# Altium PCB PCB1.PcbDoc
Units mil, origin at the board's own origin, x right, y up, seen from the top; angles counter-clockwise.
Board outline 4000 x 3125 mil, 4 copper layers (Top Layer, GND, POWER, Bottom Layer), stack 30.634 mil thick; 119 components, 91 nets, 399 pads, 77 vias.
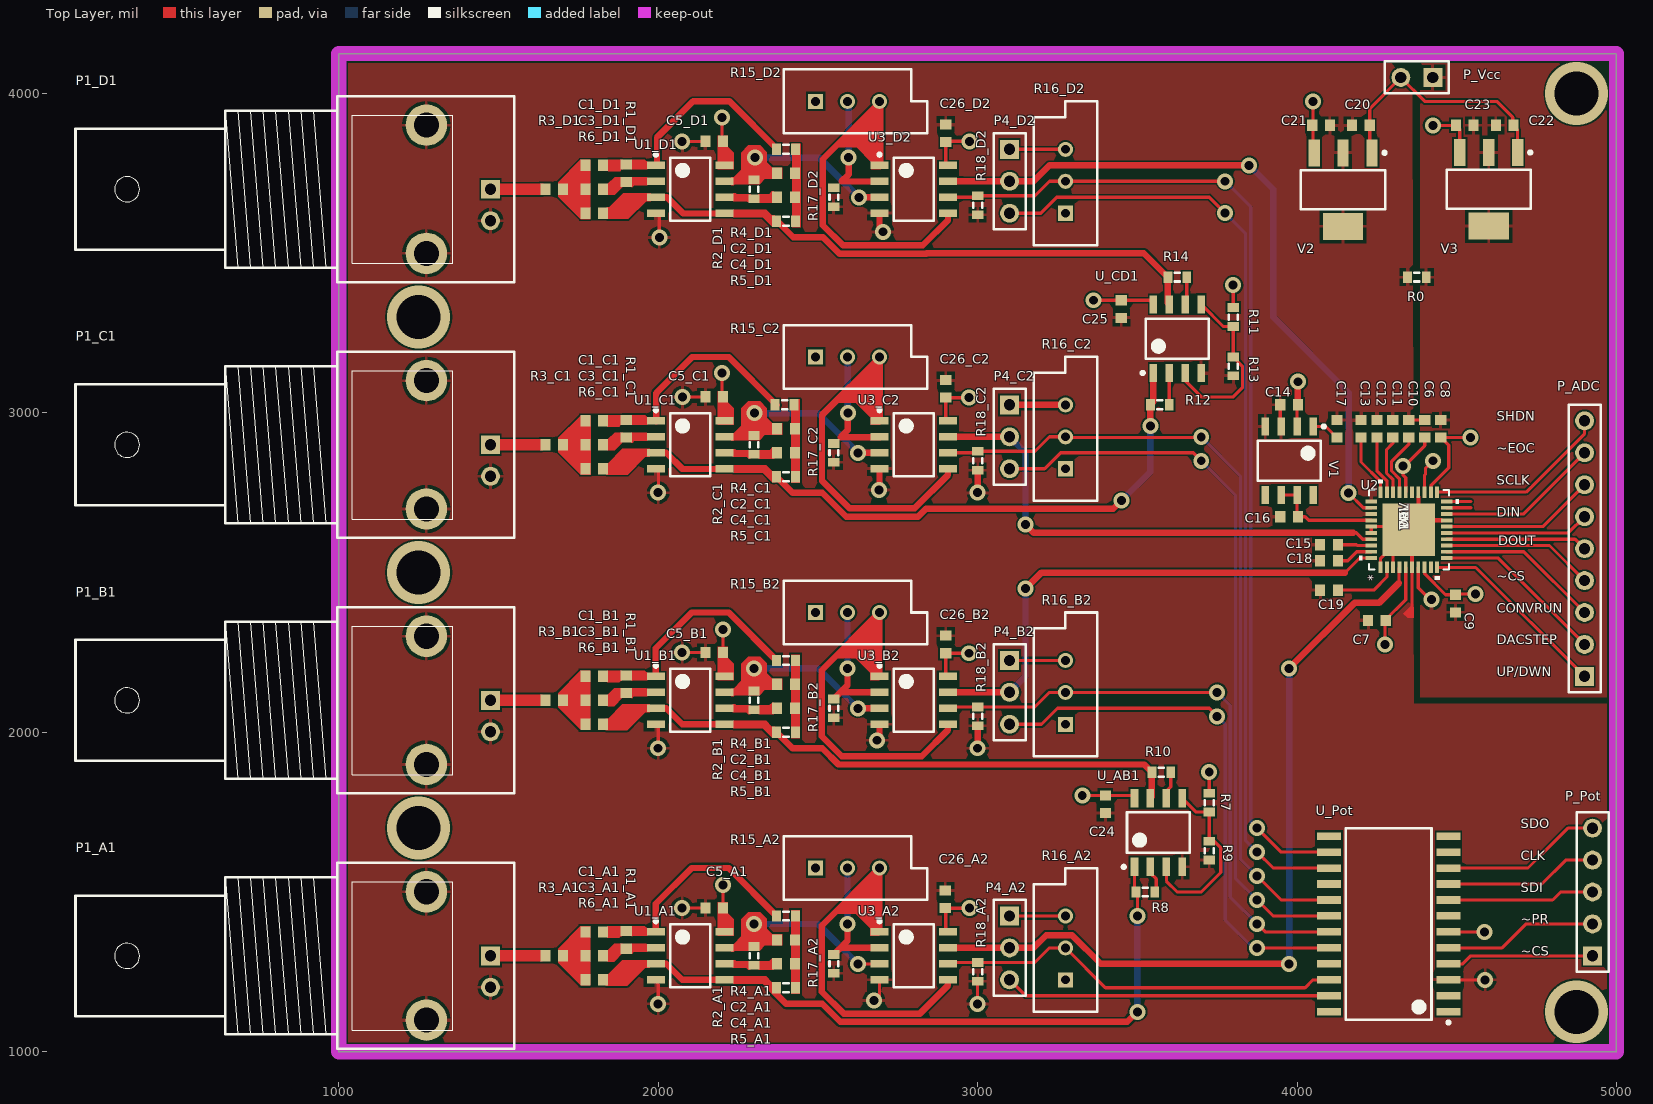
[diagram p0: Top Layer view]
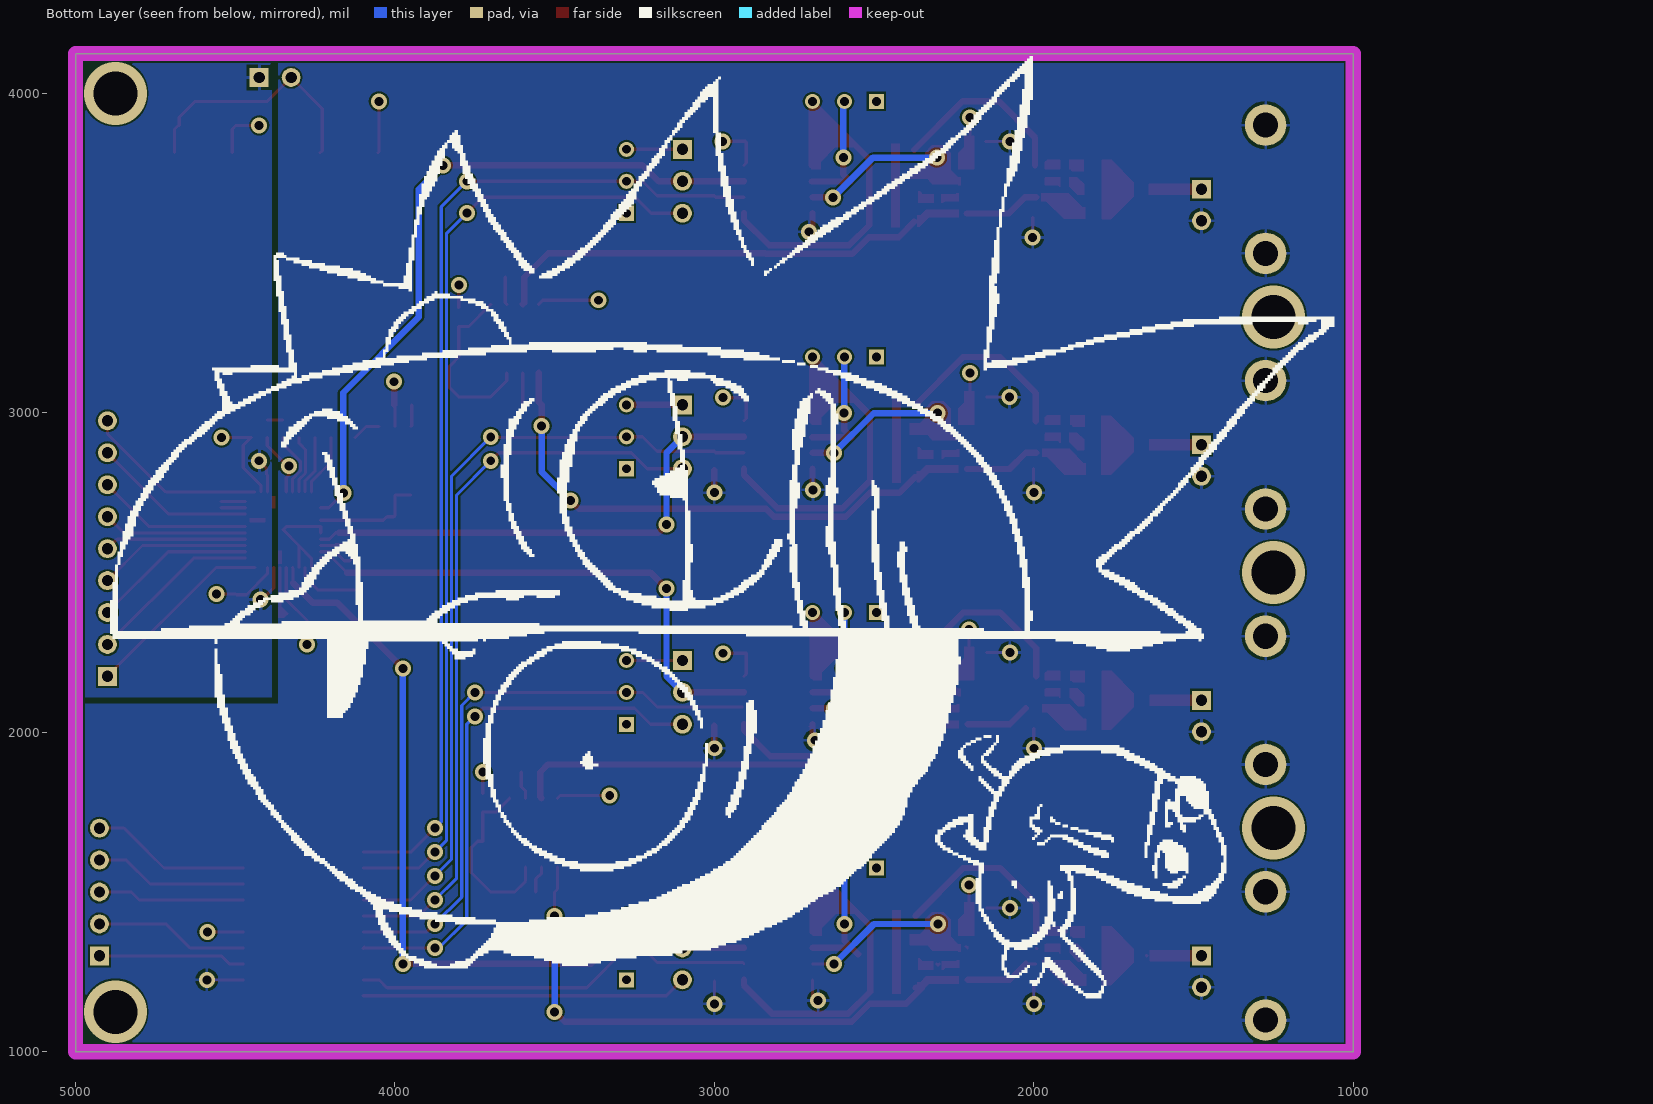
[diagram p1: Bottom Layer view, seen from below]
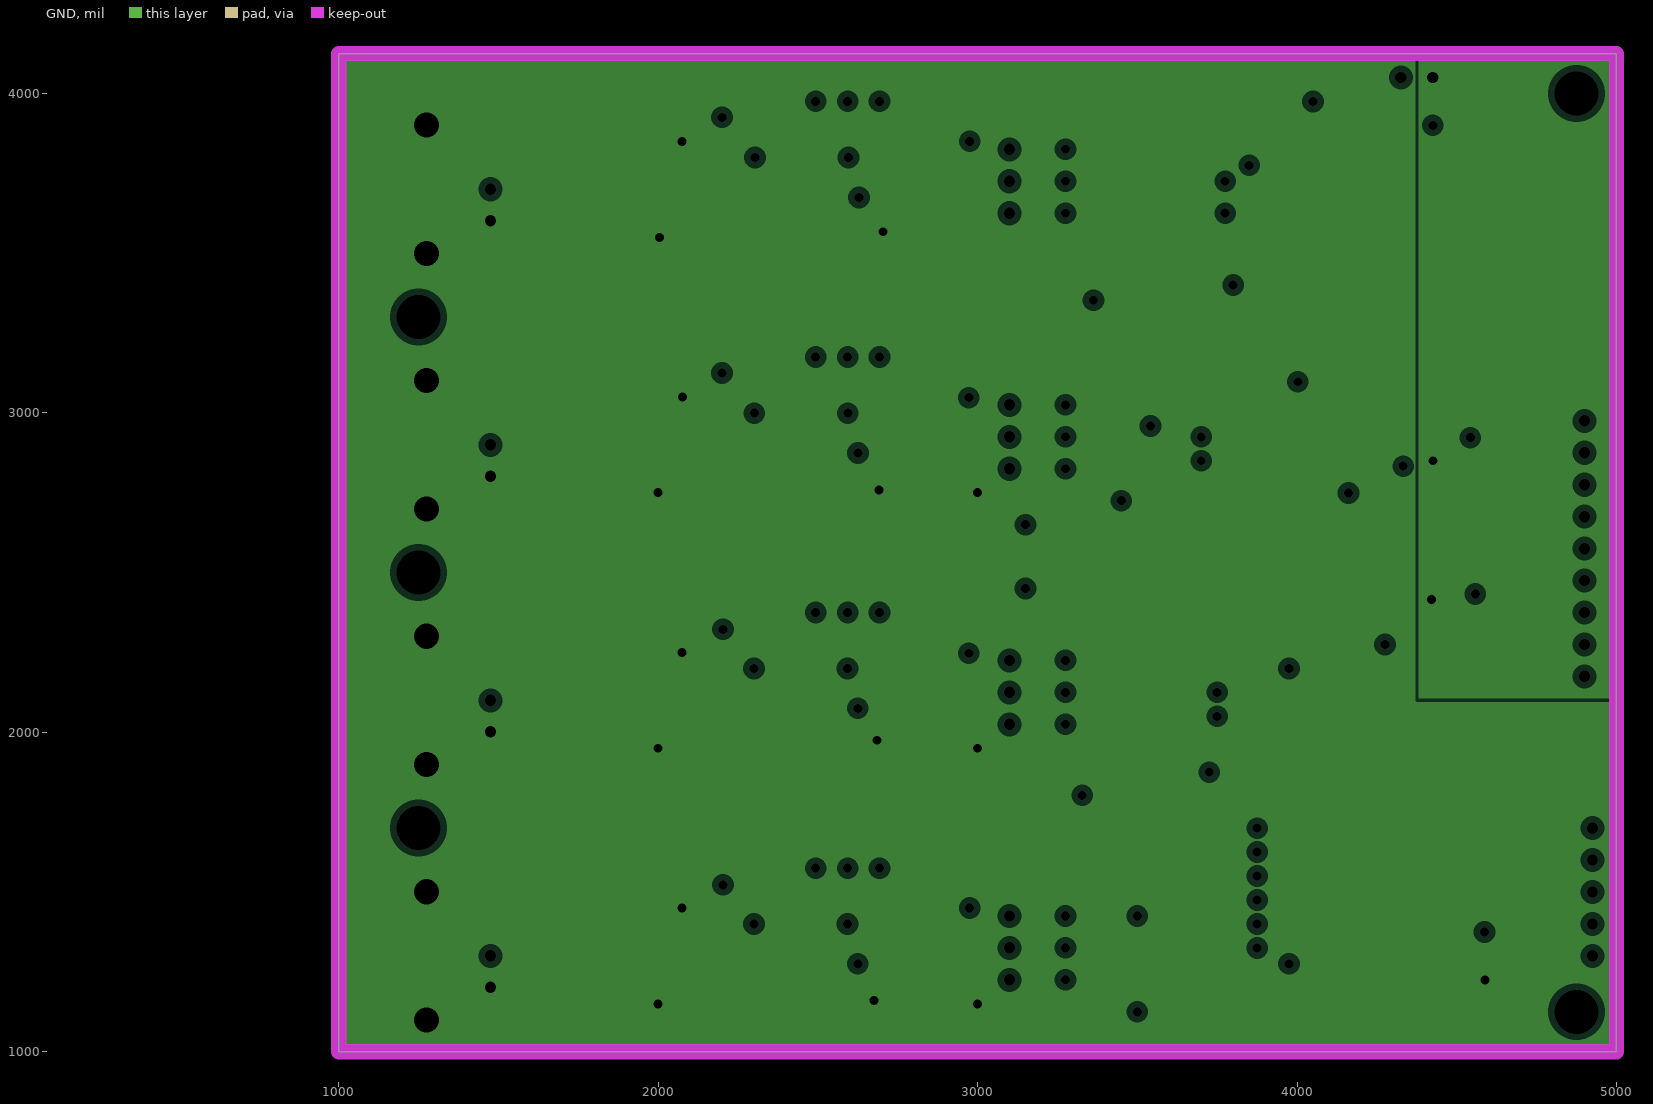
[diagram p2: GND, clearances drawn from the general rule]
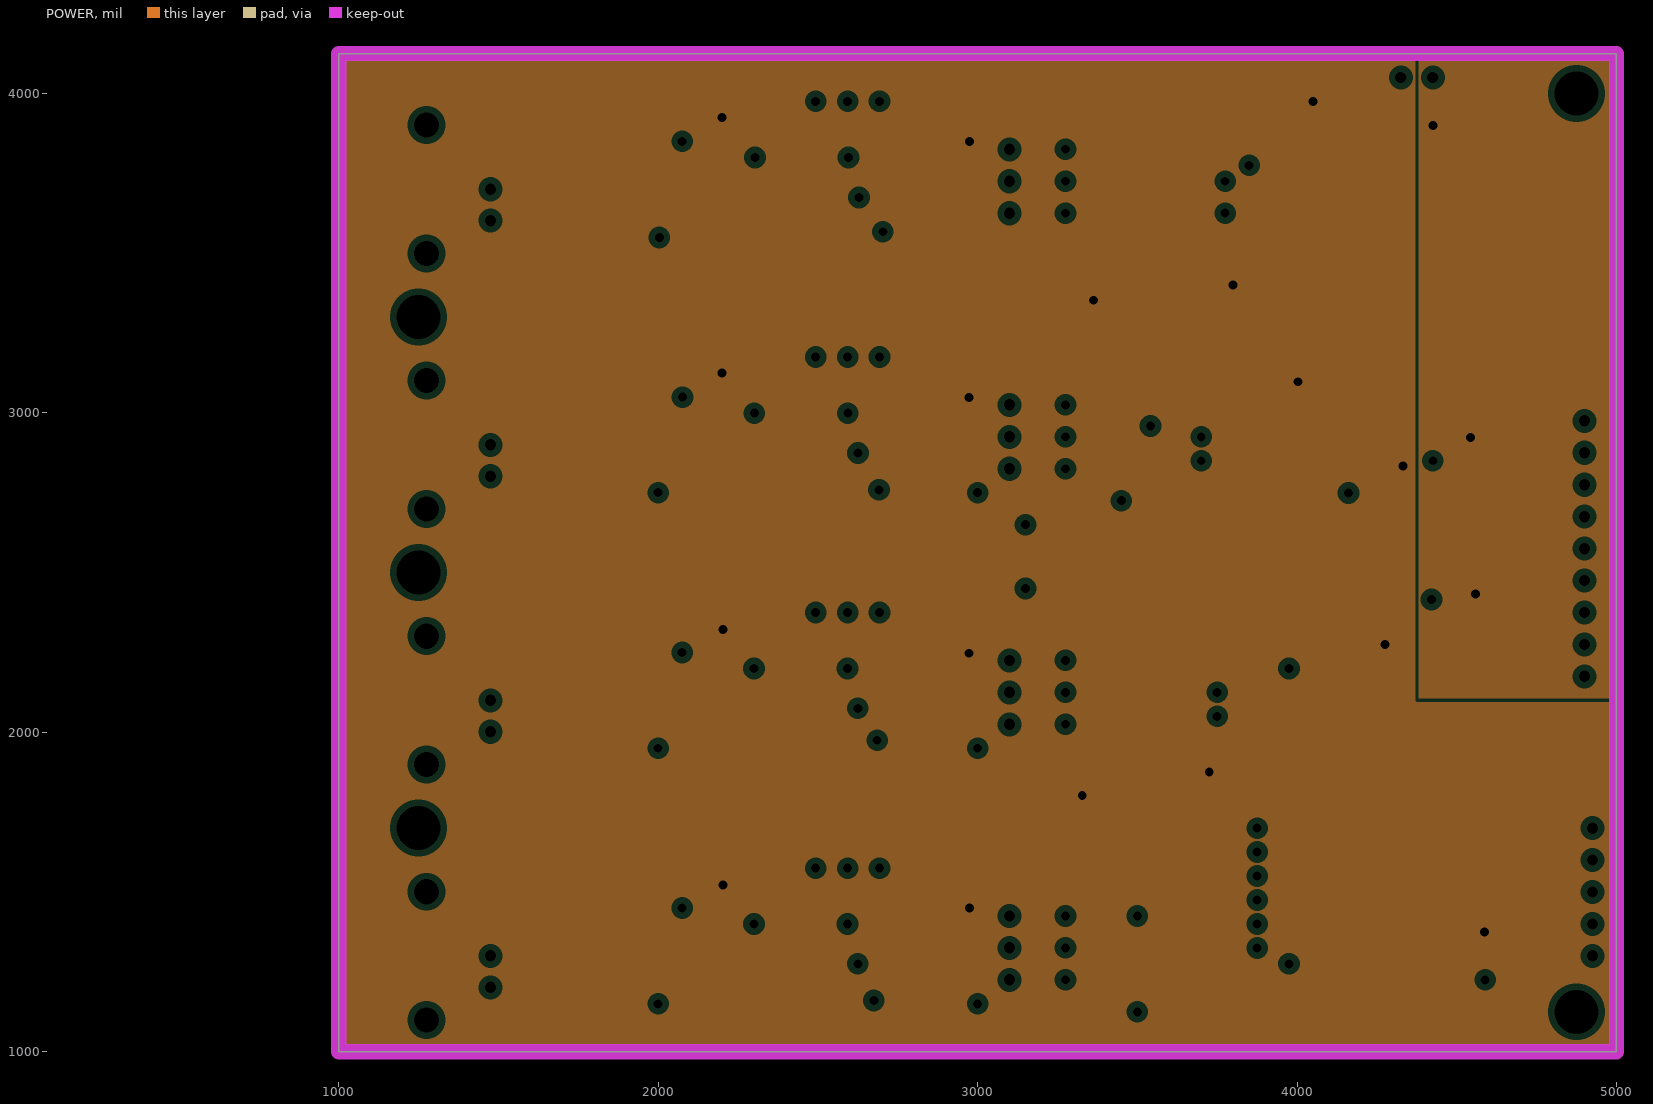
[diagram p3: POWER, clearances drawn from the general rule]

## Layer stack, top to bottom
Top Solder: solder mask 0.4, Solder Resist, Dk 3.5
Top Layer: signal copper 1.4
Dielectric 1: core 10, FR-4, Dk 4.2
GND: plane copper 1.417, net (Multiple Nets)
Dielectric 3: prepreg 5, Dk 4.2
POWER: plane copper 1.417, net (Multiple Nets)
Dielectric 2: core 10, Dk 4.2
Bottom Layer: signal copper 1.4
Bottom Solder: solder mask 0.4, Solder Resist, Dk 3.5

## Board outline
1000,1000 5000,1000 5000,4125 1000,4125

## Design rules (kind name [scope] priority, off if disabled: settings)
Clearance [All] p1: gap=6
PlaneClearance [All] p1: clearance=20
PlaneConnect [All] p1: planeconnectstyle=Relief reliefexpansion=20 reliefentries=4 reliefconductorwidth=10 reliefairgap=10
PolygonConnect [All] p1: connectstyle=Relief reliefconductorwidth=10 reliefentries=4 polygonreliefangle="90 Angle" airgapwidth=10
RoomDefinition D1 [InComponentClass('D1')] p1 off: confinementstyle=ConfineIn formatcopy=TRUE lockcomponents=FALSE outline 0,0 2000,0 2000,1000 0,1000
RoomDefinition C2 [InComponentClass('C2')] p2 off: confinementstyle=ConfineIn formatcopy=TRUE lockcomponents=FALSE outline 0,0 2000,0 2000,1000 0,1000
RoomDefinition C1 [InComponentClass('C1')] p3 off: confinementstyle=ConfineIn formatcopy=TRUE lockcomponents=FALSE outline 0,0 2000,0 2000,1000 0,1000
RoomDefinition B2 [InComponentClass('B2')] p4 off: confinementstyle=ConfineIn formatcopy=TRUE lockcomponents=FALSE outline 0,0 2000,0 2000,1000 0,1000
RoomDefinition B1 [InComponentClass('B1')] p5 off: confinementstyle=ConfineIn formatcopy=TRUE lockcomponents=FALSE outline 0,0 2000,0 2000,1000 0,1000
RoomDefinition A2 [InComponentClass('A2')] p6 off: confinementstyle=ConfineIn formatcopy=TRUE lockcomponents=FALSE outline 0,0 2000,0 2000,1000 0,1000
RoomDefinition A1 [InComponentClass('A1')] p7 off: confinementstyle=ConfineIn formatcopy=TRUE lockcomponents=FALSE outline 0,0 2000,0 2000,1000 0,1000
RoomDefinition U_Power [InComponentClass('U_Power')] p8 off: confinementstyle=ConfineIn formatcopy=TRUE lockcomponents=FALSE outline 0,0 2000,0 2000,1000 0,1000
RoomDefinition U_ADC [InComponentClass('U_ADC')] p9 off: confinementstyle=ConfineIn formatcopy=TRUE lockcomponents=FALSE outline 0,0 2000,0 2000,1000 0,1000
RoomDefinition Top_level [InComponentClass('Top_level')] p10 off: confinementstyle=ConfineIn formatcopy=TRUE lockcomponents=FALSE outline 0,0 2000,0 2000,1000 0,1000
RoomDefinition D2 [InComponentClass('D2')] p11 off: confinementstyle=ConfineIn formatcopy=TRUE lockcomponents=FALSE outline 0,0 2000,0 2000,1000 0,1000
RoutingVias [All] p1: holewidth=28 width=50 viastyle="Through Hole" minholewidth=28 minwidth=50 maxholewidth=28 maxwidth=50
SolderMaskExpansion [All] p1: expansion=4
Width [All] p1: maxlimit=20 minlimit=10 preferedwidth=10
28 further rules are at their usual default settings.

## Classes and differential pairs
channel class Amp_Stage: A2 B2 C2 D2
component class A1: C1_A1 C2_A1 C3_A1 C4_A1 C5_A1 P1_A1 R1_A1 R2_A1 R3_A1 R4_A1 R5_A1 R6_A1 U1_A1
component class B2: C26_B2 P4_B2 R15_B2 R16_B2 R17_B2 R18_B2 U3_B2
component class C2: C26_C2 P4_C2 R15_C2 R16_C2 R17_C2 R18_C2 U3_C2
component class D2: C26_D2 P4_D2 R15_D2 R16_D2 R17_D2 R18_D2 U3_D2
component class A2: C26_A2 P4_A2 R15_A2 R16_A2 R17_A2 R18_A2 U3_A2
component class B1: C1_B1 C2_B1 C3_B1 C4_B1 C5_B1 P1_B1 R1_B1 R2_B1 R3_B1 R4_B1 R5_B1 R6_B1 U1_B1
component class C1: C1_C1 C2_C1 C3_C1 C4_C1 C5_C1 P1_C1 R1_C1 R2_C1 R3_C1 R4_C1 R5_C1 R6_C1 U1_C1
component class D1: C1_D1 C2_D1 C3_D1 C4_D1 C5_D1 P1_D1 R1_D1 R2_D1 R3_D1 R4_D1 R5_D1 R6_D1 U1_D1
component class Top_level: C24 C25 P_ADC P_Pot P_Vcc R0 R7 R8 R9 R10 R11 R12 R13 R14 U_AB1 U_CD1 U_Pot
component class U_ADC: C6 C7 C8 C9 C10 C11 C12 C13 C14 C15 C16 C17 C18 C19 U2 V1
component class U_Power: C20 C21 C22 C23 V2 V3
channel class Active_filter: A2 B2 C2 D2

## Components (designator, comment, footprint, x,y, rotation, side; value= is the part's Value field where it differs from the comment)
C1_A1 "Cap" 1608[0603] 1800,1375 r0 top (schematic designator C1)
C1_B1 "Cap" 1608[0603] 1800,2175 r0 top (schematic designator C1)
C1_C1 "Cap" 1608[0603] 1800,2975 r0 top (schematic designator C1)
C1_D1 "Cap" 1608[0603] 1800,3775 r0 top (schematic designator C1)
C2_A1 "Cap" 1608[0603] 2400,1350 r180 top (schematic designator C2)
C2_B1 "Cap" 1608[0603] 2400,2150 r180 top (schematic designator C2)
C2_C1 "Cap" 1608[0603] 2400,2950 r180 top (schematic designator C2)
C2_D1 "Cap" 1608[0603] 2400,3750 r180 top (schematic designator C2)
C3_A1 "Cap" 1608[0603] 1800,1300 r0 top (schematic designator C3)
C3_B1 "Cap" 1608[0603] 1800,2100 r0 top (schematic designator C3)
C3_C1 "Cap" 1608[0603] 1800,2900 r0 top (schematic designator C3)
C3_D1 "Cap" 1608[0603] 1800,3700 r0 top (schematic designator C3)
C4_A1 "Cap" 1608[0603] 2400,1275 r0 top (schematic designator C4)
C4_B1 "Cap" 1608[0603] 2400,2075 r0 top (schematic designator C4)
C4_C1 "Cap" 1608[0603] 2400,2875 r0 top (schematic designator C4)
C4_D1 "Cap" 1608[0603] 2400,3675 r0 top (schematic designator C4)
C5_A1 "Cap" 1608[0603] 2175,1450 r0 top (schematic designator C5)
C5_B1 "Cap" 1608[0603] 2175,2250 r0 top (schematic designator C5)
C5_C1 "Cap" 1608[0603] 2175,3050 r0 top (schematic designator C5)
C5_D1 "Cap" 1608[0603] 2175,3850 r0 top (schematic designator C5)
C6 "Cap" 1608[0603] 4400,2950 r270 top
C7 "Cap" 1608[0603] 4250,2350 r0 top
C8 "Cap" 1608[0603] 4450,2950 r90 top
C9 "Cap" 1608[0603] 4496,2403 r270 top
C10 "Cap" 1608[0603] 4350,2950 r270 top
C11 "Cap" 1608[0603] 4300,2950 r270 top
C12 "Cap" 1608[0603] 4250,2950 r270 top
C13 "Cap" 1608[0603] 4200,2950 r270 top
C14 "Cap" 1608[0603] 3975,3025 r0 top
C15 "Cap" 1608[0603] 4100,2587 r0 top
C16 "Cap" 1608[0603] 3975,2675 r0 top
C17 "Cap" 1608[0603] 4125,2950 r270 top
C18 "Cap" 1608[0603] 4100,2537 r0 top
C19 "Cap" 1608[0603] 4100,2445 r0 top
C20 "Cap" 1608[0603] 4200,3900 r0 top
C21 "Cap" 1608[0603] 4075,3900 r180 top
C22 "Cap" 1608[0603] 4650,3900 r0 top
C23 "Cap" 1608[0603] 4525,3900 r180 top
C24 "Cap" 1608[0603] 3400,1775 r90 top
C25 "Cap" 1608[0603] 3450,3325 r90 top
C26_A2 "Cap" 1608[0603] 2899,1477 r270 top (schematic designator C26)
C26_B2 "Cap" 1608[0603] 2900,2275 r270 top (schematic designator C26)
C26_C2 "Cap" 1608[0603] 2900,3075 r270 top (schematic designator C26)
C26_D2 "Cap" 1608[0603] 2900,3875 r270 top (schematic designator C26)
P1_A1 "BNC" "BNC_RA CON" 1475,1300 r0 top locked (schematic designator P1)
P1_B1 "BNC" "BNC_RA CON" 1475,2100 r0 top locked (schematic designator P1)
P1_C1 "BNC" "BNC_RA CON" 1475,2900 r0 top locked (schematic designator P1)
P1_D1 "BNC" "BNC_RA CON" 1475,3700 r0 top locked (schematic designator P1)
P4_A2 "Header 3" HDR1X3 3100,1425 r270 top (schematic designator P4)
P4_B2 "Header 3" HDR1X3 3100,2225 r270 top (schematic designator P4)
P4_C2 "Header 3" HDR1X3 3100,3025 r270 top (schematic designator P4)
P4_D2 "Header 3" HDR1X3 3100,3825 r270 top (schematic designator P4)
P_ADC "Header 9" HDR1X9 4900,2175 r90 top
P_Pot "Header 5" HDR1X5 4925,1300 r90 top
P_Vcc "Header 2" HDR1X2 4425,4050 r180 top
R0 "Res3" J1-0603 4375,3425 r0 top
R1_A1 "Res3" 1608[0603] 1900,1350 r90 top (schematic designator R1)
R1_B1 "Res3" 1608[0603] 1900,2150 r90 top (schematic designator R1)
R1_C1 "Res3" 1608[0603] 1900,2950 r90 top (schematic designator R1)
R1_D1 "Res3" 1608[0603] 1900,3750 r90 top (schematic designator R1)
R2_A1 "Res3" J1-0603 2300,1300 r270 top (schematic designator R2)
R2_B1 "Res3" J1-0603 2300,2100 r270 top (schematic designator R2)
R2_C1 "Res3" J1-0603 2300,2900 r270 top (schematic designator R2)
R2_D1 "Res3" J1-0603 2300,3700 r270 top (schematic designator R2)
R3_A1 "Res3" 1608[0603] 1675,1300 r180 top (schematic designator R3)
R3_B1 "Res3" 1608[0603] 1675,2100 r180 top (schematic designator R3)
R3_C1 "Res3" 1608[0603] 1675,2900 r180 top (schematic designator R3)
R3_D1 "Res3" 1608[0603] 1675,3700 r180 top (schematic designator R3)
R4_A1 "Res3" J1-0603 2400,1425 r180 top (schematic designator R4)
R4_B1 "Res3" J1-0603 2400,2225 r180 top (schematic designator R4)
R4_C1 "Res3" J1-0603 2395.47,3025 r180 top (schematic designator R4)
R4_D1 "Res3" J1-0603 2400,3825 r180 top (schematic designator R4)
R5_A1 "Res3" J1-0603 2400,1200 r180 top (schematic designator R5)
R5_B1 "Res3" J1-0603 2400,2000 r180 top (schematic designator R5)
R5_C1 "Res3" J1-0603 2400,2800 r180 top (schematic designator R5)
R5_D1 "Res3" J1-0603 2400,3600 r180 top (schematic designator R5)
R6_A1 "Res3" 1608[0603] 1800,1225 r180 top (schematic designator R6)
R6_B1 "Res3" 1608[0603] 1800,2025 r180 top (schematic designator R6)
R6_C1 "Res3" 1608[0603] 1800,2825 r180 top (schematic designator R6)
R6_D1 "Res3" 1608[0603] 1800,3625 r180 top (schematic designator R6)
R7 "Res3" J1-0603 3725,1779.53 r90 top
R8 "Res3" J1-0603 3525,1500 r180 top
R9 "Res3" J1-0603 3725,1629.53 r90 top
R10 "Res3" J1-0603 3575,1875 r180 top
R11 "Res3" J1-0603 3800,3300 r90 top
R12 "Res3" J1-0603 3570.47,3025 r180 top
R13 "Res3" J1-0603 3800,3145.47 r90 top
R14 "Res3" J1-0603 3625,3425 r180 top
R15_A2 "RPot" VR5 2592.72,1575 r0 top (schematic designator R15)
R15_B2 "RPot" VR5 2592.72,2375 r0 top (schematic designator R15)
R15_C2 "RPot" VR5 2592.72,3175 r0 top (schematic designator R15)
R15_D2 "RPot" VR5 2592.72,3975 r0 top (schematic designator R15)
R16_A2 "RPot" VR5 3275,1325 r90 top (schematic designator R16)
R16_B2 "RPot" VR5 3275,2125 r90 top (schematic designator R16)
R16_C2 "RPot" VR5 3275,2925 r90 top (schematic designator R16)
R16_D2 "RPot" VR5 3275,3725 r90 top (schematic designator R16)
R17_A2 "Res3" J1-0603 2550,1275 r90 top (schematic designator R17)
R17_B2 "Res3" J1-0603 2550,2075 r90 top (schematic designator R17)
R17_C2 "Res3" J1-0603 2550,2875 r90 top (schematic designator R17)
R17_D2 "Res3" J1-0603 2550,3675 r90 top (schematic designator R17)
R18_A2 "Res3" J1-0603 3000,1250 r90 top (schematic designator R18)
R18_B2 "Res3" J1-0603 3000,2050 r90 top (schematic designator R18)
R18_C2 "Res3" J1-0603 3000,2850 r90 top (schematic designator R18)
R18_D2 "Res3" J1-0603 3000,3650 r90 top (schematic designator R18)
U1_A1 "LT6234" SOIC127P600X150-8N(LT6233) 2100,1300 r0 top (schematic designator U1)
U1_B1 "LT6234" SOIC127P600X150-8N(LT6233) 2100,2100 r0 top (schematic designator U1)
U1_C1 "LT6234" SOIC127P600X150-8N(LT6233) 2100,2900 r0 top (schematic designator U1)
U1_D1 "LT6234" SOIC127P600X150-8N(LT6233) 2100,3700 r0 top (schematic designator U1)
U2 "MAXIM11043" 21-0141I_T406600 4350,2634 r90 top
U3_A2 "LM358DR" SOIC127P600X175-8N(lm358) 2800,1300 r0 top (schematic designator U3)
U3_B2 "LM358DR" SOIC127P600X175-8N(lm358) 2800,2100 r0 top (schematic designator U3)
U3_C2 "LM358DR" SOIC127P600X175-8N(lm358) 2800,2900 r0 top (schematic designator U3)
U3_D2 "LM358DR" SOIC127P600X175-8N(lm358) 2800,3700 r0 top (schematic designator U3)
U_AB1 "LM358DR" SOIC127P600X175-8N(lm358) 3566,1686 r90 top
U_CD1 "LM358DR" SOIC127P600X175-8N(lm358) 3625,3232.28 r90 top
U_Pot "AD5204" SOIC127P1030X265-24N(AD5204) 4287.01,1400 r180 top
V1 "MAX6126" SOIC127P600X175-8N(lm358) 3975,2850 r270 top
V2 "LM3940" SOT230P700X170-4N 4144,3699 r270 top
V3 "LM3940" SOT230P700X170-4N 4600,3700 r270 top

## Footprints (in the part's own frame and the unit in brackets; to place one, negate y for a bottom-side part, rotate by r counter-clockwise, add the part's x,y. Pads: shape width x height; smd on the part's side, far side on the other; paste and mask are expansions set on the pad)
21-0141I_T406600 [mil]
  rect 36x12 smd: 1(-118,88.58) 2(-118,68.9) 3(-118,49.21) 4(-118,29.53) 5(-118,9.84) 6(-118,-9.84) 7(-118,-29.53) 8(-118,-49.21) 9(-118,-68.9) 10(-118,-88.58) 21(118,-88.58) 22(118,-68.9) 23(118,-49.21) 24(118,-29.53) 25(118,-9.84) 26(118,9.84) 27(118,29.53) 28(118,49.21) 29(118,68.9) 30(118,88.58)
  rect 12x36 smd: 11(-88.58,-118) 12(-68.9,-118) 13(-49.21,-118) 14(-29.53,-118) 15(-9.84,-118) 16(9.84,-118) 17(29.53,-118) 18(49.21,-118) 19(68.9,-118) 20(88.58,-118) 31(88.58,118) 32(68.9,118) 33(49.21,118) 34(29.53,118) 35(9.84,118) 36(-9.84,118) 37(-29.53,118) 38(-49.21,118) 39(-68.9,118) 40(-88.58,118)
  rect 165x165 smd paste-82: 41(0,0)
  silkscreen extent -156,-156 156,156, body extent 0,0 10,10, height 10
1608[0603] [mm] "Chip Capacitor, Body 1.6x0.8mm, IPC High Density"
  rect 0.8x0.9 smd: 1(-0.7,0) 2(0.7,0)
  body extent -0.87,-0.48 0.87,0.48, height 1.3
"BNC_RA CON" [mm] "Connector; BNC Elbow"
  rect 1.5x1.5 hole 0.9: 1(0,0)
  round 3.3 hole 2: 2(-5.1,-5.1) 2(-5.1,5.1)
  round 1.5 hole 0.9: 2(0,-2.5)
  silkscreen extent -33,-7.4 1.9,7.4
HDR1X2 [mm] "Connector; Header; 2 Position"
  rect 1.5x1.5 hole 0.9: 1(0,0)
  round 1.5 hole 0.9: 2(2.54,0)
  silkscreen extent -1.27,-1.27 3.81,1.27
HDR1X3 [mm] "Connector; Header; 3 Position"
  rect 1.5x1.5 hole 0.9: 1(0,0)
  round 1.5 hole 0.9: 2(2.54,0) 3(5.08,0)
  silkscreen extent -1.27,-1.27 6.35,1.27
HDR1X5 [mm] "Connector; Header; 5 Position"
  rect 1.5x1.5 hole 0.9: 1(0,0)
  round 1.5 hole 0.9: 2(2.54,0) 3(5.08,0) 4(7.62,0) 5(10.16,0)
  silkscreen extent -1.27,-1.27 11.43,1.27
HDR1X9 [mm] "Connector; Header; 9 Position"
  rect 1.5x1.5 hole 0.9: 1(0,0)
  round 1.5 hole 0.9: 2(2.54,0) 3(5.08,0) 4(7.62,0) 5(10.16,0) 6(12.7,0) 7(15.24,0) 8(17.78,0) 9(20.32,0)
  silkscreen extent -1.27,-1.27 21.59,1.27
J1-0603 [mm] "Chip Resistor, Body 1.6x0.8mm, IPC High Density"
  rect 0.7x0.9 smd: 1(-0.75,0) 2(0.75,0)
  silkscreen extent -0.2,-0.35 0.2,0.35, body extent -0.85,-0.48 0.85,0.48, height 0.9
SOIC127P600X150-8N(LT6233) [mm] "SOIC, 8-Leads, Body 4.90x3.90mm, Pitch 1.27mm, IPC Medium Density"
  rect 1.45x0.6 smd: 1(-2.725,1.905) 2(-2.725,0.635) 3(-2.725,-0.635) 4(-2.725,-1.905) 5(2.725,-1.905) 6(2.725,-0.635) 7(2.725,0.635) 8(2.725,1.905)
  silkscreen extent -2.85,-2.5 1.6,2.88, body extent -2,-2.5 2,2.5, height 1.5
SOIC127P600X175-8N(lm358) [mm] "SOIC, 8-Leads, Body 4.90x3.90mm, Pitch 1.27mm, IPC Medium Density"
  rect 1.45x0.6 smd: 1(-2.725,1.905) 2(-2.725,0.635) 3(-2.725,-0.635) 4(-2.725,-1.905) 5(2.725,-1.905) 6(2.725,-0.635) 7(2.725,0.635) 8(2.725,1.905)
  silkscreen extent -2.85,-2.5 1.6,2.88, body extent -2,-2.5 2,2.5, height 1.75
SOIC127P1030X265-24N(AD5204) [mm] "SOIC, 24-Leads, Body 15.40x7.50mm, Pitch 1.27mm, IPC Medium Density"
  rect 1.9x0.6 smd: 1(-4.75,6.985) 2(-4.75,5.715) 3(-4.75,4.445) 4(-4.75,3.175) 5(-4.75,1.905) 6(-4.75,0.635) 7(-4.75,-0.635) 8(-4.75,-1.905) 9(-4.75,-3.175) 10(-4.75,-4.445) 11(-4.75,-5.715) 12(-4.75,-6.985) 13(4.75,-6.985) 14(4.75,-5.715) 15(4.75,-4.445) 16(4.75,-3.175) 17(4.75,-1.905) 18(4.75,-0.635) 19(4.75,0.635) 20(4.75,1.905) 21(4.75,3.175) 22(4.75,4.445) 23(4.75,5.715) 24(4.75,6.985)
  silkscreen extent -4.88,-7.6 3.4,7.96, body extent -3.8,-7.6 3.8,7.6, height 2.65
SOT230P700X170-4N [mm] "SOT223, 4-Leads, Body 6.50x7.00mm (avg), Pitch 2.30mm, IPC Medium Density"
  rect 2.15x0.9 smd: 1(-2.925,2.3) 2(-2.925,0) 3(-2.925,-2.3)
  rect 2.15x3.2 smd: 4(2.925,0)
  silkscreen extent -3.05,-3.35 1.55,3.43, body extent -1.85,-3.35 1.85,3.35, height 1.7
VR5 [mm] "Thru-Hole; 3 Leads"
  rect 1.2x1.2 hole 0.7: 1(-2.54,0)
  round 1.2 hole 0.7: 2(0,0) 3(2.54,0)
  silkscreen extent -5.08,-2.54 6.35,2.54

## Part data
C1_A1 C1_B1 C1_C1 C1_D1 C2_A1 C2_B1 C2_C1 C2_D1 C3_A1 C3_B1 C3_C1 C3_D1 C4_A1 C4_B1 C4_C1 C4_D1 C5_A1 C5_B1 C5_C1 C5_D1 C6 C7 C8 C9 C10 C11 C12 C13 C14 C15 C16 C17 C18 C19 C20 C21 C22 C23 C24 C25 C26_A2 C26_B2 C26_C2 C26_D2: "Capacitor"
P1_A1 P1_B1 P1_C1 P1_D1: "BNC Elbow Connector"
P4_A2 P4_B2 P4_C2 P4_D2: "Header, 3-Pin"
P_ADC: "Header, 9-Pin"
P_Pot: "Header, 5-Pin"
P_Vcc: "Header, 2-Pin"
R0 R1_A1 R1_B1 R1_C1 R1_D1 R2_A1 R2_B1 R2_C1 R2_D1 R3_A1 R3_B1 R3_C1 R3_D1 R4_A1 R4_B1 R4_C1 R4_D1 R5_A1 R5_B1 R5_C1 R5_D1 R6_A1 R6_B1 R6_C1 R6_D1 R7 R8 R9 R10 R11 R12 R13 R14 R17_A2 R17_B2 R17_C2 R17_D2 R18_A2 R18_B2 R18_C2 R18_D2: "Resistor"
R15_A2 R15_B2 R15_C2 R15_D2 R16_A2 R16_B2 R16_C2 R16_D2: "Potentiometer"

## Via types
v1: diameter 50, hole 28, Top Layer to Bottom Layer, 72 vias
v2: diameter 196.85, hole 137.8, Top Layer to Bottom Layer, 5 vias

## Nets (pads, with @x,y where several pads share a name; then routed paths per layer and width w, separated by ;. In a path a pad name is that pad's centre, name@x,y a point inside that pad or via, vN(x,y) a via of type N, cw(c..) or ccw(c..) an arc to the next point about the centre after c; other vN are vias at no path point)
3.3V_A: C5_A1.2 C5_B1.2 C5_C1.2 C5_D1.2 C6.2 C7.2 C14.2 C21.2 C24.2 C25.2 C26_A2.2 C26_B2.2 C26_C2.2 C26_D2.2 R7.2 R11.2 U1_A1.8 U1_B1.8 U1_C1.8 U1_D1.8 U2.5 U2.26 U3_A2.8 U3_B2.8 U3_C2.8 U3_D2.8 U_AB1.8 U_CD1.8 U_Pot.6 V1.2 V2.3 | length 2255.4
  Top Layer w10: v1(2200,3125) 2200,3052.56 C5_C1.2 ; v1(2200,3925) 2200,3852.56 C5_D1.2 ; C5_A1.2 v1(2202.56,1522.44) ; C5_B1.2 v1(2202.56,2322.44) ; C26_A2.2 2949.44,1449.44 ; C26_A2.2@2900,1447.44 2900,1382.28 U3_A2.8 ; U3_B2.8 2900,2182.28 C26_B2.2 v1(2972.44,2247.44) ; U3_C2.8 2900,2982.28 C26_C2.2 v1(2972.44,3047.44) ; U3_D2.8 2900,3782.28 C26_D2.2 2902.56,3850 v1(2975,3850) ; v1(3327.56,1802.56) C24.2 3481.72,1802.56 U_AB1.8 ; v1(3362.44,3352.56) C25.2 3537.01,3352.56 U_CD1.8 ; R7.2 v1(3725,1875) ; R11.2 v1(3800,3400) ; V1.2 4000,3022.44 C14.2 ; v1(4050,3975) 4050,3817.61 V2.3 ; v1(4275,2275) 4275,2350 4340.16,2415.16 U2.5 ; U2.26 4340.16,2796.56 4332,2804.72 v1(4332,2833) 4335.56,2833 4400,2897.44 C6.2 ; U_Pot.6 v1(4587,1375)
  Top Layer w20: C14.2 v1(4002.56,3097.44)
  other v1: 2975,1450
5V: C20.2 C22.2 P_Vcc.2 V2.1 V3.1 | length 796.1
  Top Layer w10: V2.1 4227.56,3821.15 C20.2 4227.56,3952.56 P_Vcc.2 4400,3975 4625,3975 4675,3925 C22.2@4675,3900 ; C22.2 4690.55,3887.01 V3.1
AGND: C5_A1.1 C5_B1.1 C5_C1.1 C5_D1.1 C6.1 C7.1 C10.1 C11.1 C12.1 C13.1 C14.1 C15.1 C16.1 C17.1 C18.1 C19.1 C20.1 C21.1 C24.1 C25.1 C26_A2.1 C26_B2.1 C26_C2.1 C26_D2.1 P1_A1.2 P1_B1.2 P1_C1.2 P1_D1.2 R0.1 R9.1 R13.1 R17_A2.1 R17_B2.1 R17_C2.1 R17_D2.1 R18_A2.1 R18_B2.1 R18_C2.1 R18_D2.1 U1_A1.4 U1_B1.4 U1_C1.4 U1_D1.4 U2.1 U2.3 U2.6 U2.17 U2.24 U2.31 U2.33 U2.35 U2.36 U2.41 U3_A2.4 U3_B2.4 U3_C2.4 U3_D2.4 U_AB1.4 U_CD1.4 U_Pot.3 V1.3 V1.4 V2.2 V2.4 | length 1775.1
  Top Layer w10: U1_A1.4 1990,1222.28 2000,1212.28 v1(2000,1150) ; v1(2000,1950) 2000,2012.28 ; v1@2000.79,2749.21 U1_C1.4@2000.79,2825 ; v1(2003.35,3549.21) 2003.35,3611.5 ; v1(2075,1450) C5_A1.1 ; v1(2075,2250) C5_B1.1 ; v1(2075.79,3049.21) C5_C1.1@2148.23,3049.21 ; v1@2078.35,3849.21 C5_D1.1@2150.79,3849.21 ; v1@2692.72,1160.43 U3_A2.4 ; U3_B2.4 U3_B2.4@2700,2017.72 ; v1(3000,1150) R18_A2.1 ; C14.1 3947.44,2959.84 V1.3 ; U2.36 U2.35 4340.16,2643.84 U2.41 U2.41@4300.79,2584.79 ; U2.1 4261.42,2545.42 U2.41@4300.79,2584.79 ; U2.3 U2.41@4300.79,2584.79 ; C10.1 C6.1 ; 4359.84,2384.84 U2.6 ; U_Pot.3 v1(4589,1225)
  Top Layer w20: v1(2685.43,1975) 2692.72,1982.28 U3_B2.4 ; v1(2691.14,2758.86) 2700,2767.72 2692.72,2775 U3_C2.4 ; U3_D2.4 2692.72,3577.56 v1(2703.35,3566.93) ; v1(3000,1950) R18_B2.1 ; v1(3000,2750) R18_C2.1
  other v1: 2675,1160.43 2000,2750 2075,3850
DI_A: R16_A2.2 R18_A2.2 U3_A2.6 U_Pot.22 | length 1275.6
  Top Layer w10: U3_A2.6 2911.81,1279.53 R18_A2.2 3179.53,1279.53 3225,1325 R16_A2.2 3400,1200 4025,1200 4050,1225 U_Pot.22
DI_B: R16_B2.2 R18_B2.2 U3_B2.6 U_Pot.19 | length 1869.2
  Top Layer w10: U3_B2.6@2911.81,2079.53 R18_B2.2 3179.53,2079.53 3225,2125 R16_B2.2 v1(3750,2125) ; v1(3875,1400) 3900,1375 U_Pot.19
  Bottom Layer w10: v1(3750,2125) 3791,2084 3791,1484 v1(3875,1400)
DI_C: R16_C2.2 R18_C2.2 U3_C2.6 U_Pot.17 | length 2522.5
  Top Layer w10: U3_C2.6 2995.47,2875 R18_C2.2 3179.53,2879.53 3225,2925 R16_C2.2 3276.94,2923.06 3701.94,2923.06 v1(3700,2925) ; v1(3875,1550) 3950,1475 U_Pot.17
  Bottom Layer w10: v1(3700,2925) 3823,2802 3823,1602 v1(3875,1550)
DI_D: R16_D2.2 R18_D2.2 U3_D2.6 U_Pot.14 | length 3210.9
  Top Layer w10: U3_D2.6 2995.47,3675 R18_D2.2 3179.53,3679.53 3225,3725 R16_D2.2 v1(3775,3725) ; v1(3875,1700) 3950,1625 U_Pot.14
  Bottom Layer w10: v1(3775,3725) 3855.13,3644.87 3855.13,1719.87 v1(3875,1700)
DO_A: P4_A2.3 U_Pot.23 | length 1020.7
  Top Layer w10: P4_A2.3 3150,1175 U_Pot.23
DO_B: P4_B2.3 U_Pot.20 | length 1692.9
  Top Layer w10: P4_B2.3 3200,2025 3250,2075 3725,2075 v1(3750,2050) ; v1(3875,1325) 4094,1325 4096,1327 4099,1324 U_Pot.20
  Bottom Layer w10: v1(3750,2050) 3775,2025 3775,1412 3862,1325 v1(3875,1325)
DO_C: P4_C2.3 U_Pot.18 | length 2324.3
  Top Layer w10: P4_C2.3 3209.62,2825 3259.62,2875 3675,2875 v1(3700,2850) ; v1(3875,1475) 3925,1425 U_Pot.18
  Bottom Layer w10: v1(3700,2850) 3807,2743 3807,1543 v1(3875,1475)
DO_D: P4_D2.3 U_Pot.15 | length 3003.6
  Top Layer w10: P4_D2.3 3197.63,3625 3247.63,3675 3725,3675 v1(3775,3625) ; v1(3875,1625) 3925,1575 U_Pot.15
  Bottom Layer w10: v1(3775,3625) 3839,3561 3839,1661 v1(3875,1625)
DVDD: C8.1 C9.1 C23.2 U2.8 U2.22 V3.3 | length 665.1
  Top Layer w10: U2.8 4399.21,2496.13 4464.78,2430.56 C9.1 4498.44,2433 v1(4558,2433) ; U2.22 4418.9,2771.87 4475,2827.97 4475,2898.44 C8.1@4451,2922.44 ; v1(4425,3900) C23.2 4509.45,3887.99 V3.3 ; C8.1 C8.1@4451,2922.44 ; v1(4542.44,2922.44) C8.1@4451,2922.44
GND: C8.2 C9.2 C22.1 C23.1 P_Vcc.1 R0.2 U2.7 U2.23 V3.2 V3.4 | length 228.8
  Top Layer w10: U2.7 4379.53,2452.47 4416,2416 v1(4421,2416) ; U2.23 4399.21,2804.67 4402,2807.46 4402,2827 v1(4425,2850)
NetC1_A1_1: C1_A1.1 C3_A1.1 R3_A1.1 R6_A1.2 | length 10.2
  Top Layer w10: R6_A1.2 R6_A1.2@1772.44,1230.12 ; C1_A1.1@1772.44,1369.88 C1_A1.1
NetC1_A1_2: C1_A1.2 R1_A1.2 R4_A1.2 U1_A1.1 | length 581.4
  Top Layer w10: R1_A1.2@1897.44,1375 R1_A1.2 ; U1_A1.1@1990.16,1377.56 U1_A1.1
  Top Layer w20: U1_A1.1 1992.72,1462.72 2105,1575 2220.47,1575 R4_A1.2
NetC1_B1_1: C1_B1.1 C3_B1.1 R3_B1.1 R6_B1.2
NetC1_B1_2: C1_B1.2 R1_B1.2 R4_B1.2 U1_B1.1 | length 574.1
  Top Layer w20: U1_B1.1 1992.72,2262.72 2105,2375 2220.47,2375 R4_B1.2
NetC1_C1_1: C1_C1.1 C3_C1.1 R3_C1.1 R6_C1.2
NetC1_C1_2: C1_C1.2 R1_C1.2 R4_C1.2 U1_C1.1 | length 574.8
  Top Layer w20: U1_C1.1@1993.5,2974.21 1993.5,3061.93 2106.57,3175 2220.47,3175 R4_C1.2@2371.26,3024.21
NetC1_D1_1: C1_D1.1 C3_D1.1 R3_D1.1 R6_D1.2
NetC1_D1_2: C1_D1.2 R1_D1.2 R4_D1.2 U1_D1.1 | length 574.8
  Top Layer w20: U1_D1.1@1996.06,3774.21 1996.06,3861.93 2109.13,3975 2223.03,3975 R4_D1.2@2373.82,3824.21
NetC2_A1_1: C2_A1.1 C4_A1.2 R4_A1.1 R5_A1.1
NetC2_A1_2: C2_A1.2 R2_A1.1 U1_A1.7 U3_A2.3 | length 455
  Top Layer w10: U1_A1.7 U1_A1.7@2211.81,1329.53 ; v1(2625,1275) U3_A2.3
  Bottom Layer w10: v1(2300,1400) 2305,1395 v1@2310,1400
  Bottom Layer w20: v1@2310,1400 2500,1400 v1(2625,1275)
NetC2_B1_1: C2_B1.1 C4_B1.2 R4_B1.1 R5_B1.1
NetC2_B1_2: C2_B1.2 R2_B1.1 U1_B1.7 U3_B2.3 | length 434.5
  Top Layer w20: v1(2625,2075) U3_B2.3
  Bottom Layer w20: v1@2310,2200 2500,2200 v1(2625,2075)
  other v1: 2300,2200
NetC2_C1_1: C2_C1.1 C4_C1.2 R4_C1.1 R5_C1.1
NetC2_C1_2: C2_C1.2 R2_C1.1 U1_C1.7 U3_C2.3 | length 434
  Top Layer w10: v1(2625.79,2874.21) v1@2626.57,2875
  Top Layer w20: v1@2626.57,2875 U3_C2.3
  Bottom Layer w20: v1@2310.79,2999.21 2500.79,2999.21 v1(2625.79,2874.21)
  other v1: 2300.79,2999.21
NetC2_D1_1: C2_D1.1 C4_D1.2 R4_D1.1 R5_D1.1
NetC2_D1_2: C2_D1.2 R2_D1.1 U1_D1.7 U3_D2.3 | length 431.5
  Top Layer w10: v1(2628.35,3674.21) v1@2629.13,3675
  Top Layer w20: v1@2629.13,3675 U3_D2.3
  Bottom Layer w20: v1@2313.35,3799.21 2503.35,3799.21 v1(2628.35,3674.21)
  other v1: 2303.35,3799.21
NetC3_A1_2: C3_A1.2 R1_A1.1 U1_A1.2 | length 3.6
  Top Layer w10: U1_A1.2@1990.16,1322.44 U1_A1.2
NetC3_B1_2: C3_B1.2 R1_B1.1 U1_B1.2
NetC3_C1_2: C3_C1.2 R1_C1.1 U1_C1.2
NetC3_D1_2: C3_D1.2 R1_D1.1 U1_D1.2
NetC4_A1_1: C4_A1.1 R2_A1.2 U1_A1.6 | length 12.8
  Top Layer w10: R2_A1.2@2295.47,1275 R2_A1.2 R2_A1.2@2304.53,1275
NetC4_B1_1: C4_B1.1 R2_B1.2 U1_B1.6
NetC4_C1_1: C4_C1.1 R2_C1.2 U1_C1.6
NetC4_D1_1: C4_D1.1 R2_D1.2 U1_D1.6
NetC10_2: C10.2 U2.27 | length 202.9
  Top Layer w10: U2.27 4320.47,2793.62 4296,2818.09 4296,2847.91 4350,2901.91 C10.2
NetC11_2: C11.2 U2.28 | length 187.3
  Top Layer w10: C11.2 4300,2905 4280,2885 4280,2811.46 4300.79,2790.67 U2.28
NetC12_2: C12.2 U2.29 | length 183.3
  Top Layer w10: C12.2 4250,2818.83 4281.1,2787.73 U2.29
NetC13_2: C13.2 U2.30 | length 195.9
  Top Layer w10: C13.2 4200,2846.21 4261.42,2784.79 U2.30
NetC15_2: C15.2 U2.38 | length 105.4
  Top Layer w10: C15.2 4185,2587 4187.21,2584.79 U2.38
NetC17_2: C17.2 V1.1 | length 89.4
  Top Layer w10: V1.1 4090.16,2957.28 C17.2
NetC18_2: C18.2 U2.39 | length 121.5
  Top Layer w10: C18.2@4127.56,2550 4140.56,2537 4159,2537 4187.1,2565.1 U2.39
NetC19_2: C19.2 U2.2 | length 200.5
  Top Layer w10: C19.2 4240,2445 4281.1,2486.1 U2.2
NetP1_A1_1: P1_A1.1 R3_A1.2 | length 1.1
  Top Layer w10: R3_A1.2@1646.65,1300.79 R3_A1.2
NetP1_B1_1: P1_B1.1 R3_B1.2
NetP1_C1_1: P1_C1.1 R3_C1.2
NetP1_D1_1: P1_D1.1 R3_D1.2
NetP4_A2_1: P4_A2.1 R16_A2.3 | length 175
  Top Layer w10: P4_A2.1 R16_A2.3
NetP4_A2_2: P4_A2.2 U2.4 U3_A2.7 | length 2550.2
  Top Layer w10: 4319.06,2467.5 4319.06,2514.59 U2.4
  Top Layer w20: U3_A2.7 P4_A2.2 3175,1325 3214.62,1364.62 3295.38,1364.62 3385,1275 v1(3975,1275) ; v1(3975,2200) 4180,2405 4256.56,2405 4319.06,2467.5
  Bottom Layer w20: v1(3975,1275) v1(3975,2200)
NetP4_B2_1: P4_B2.1 R16_B2.3 | length 175
  Top Layer w10: P4_B2.1 R16_B2.3
NetP4_B2_2: P4_B2.2 U2.40 U3_B2.7 | length 1660
  Top Layer w10: 4150,2500 4195.42,2545.42 U2.40
  Top Layer w20: U3_B2.7 P4_B2.2 ; v1(3150,2450) 3200,2500 4150,2500
  Bottom Layer w20: P4_B2.2 3150,2175 v1(3150,2450)
NetP4_C2_1: P4_C2.1 R16_C2.3 | length 175
  Top Layer w20: P4_C2.1 R16_C2.3
NetP4_C2_2: P4_C2.2 U2.37 U3_C2.7 | length 1589.3
  Top Layer w10: 4176,2625 4185,2625 4205.53,2604.47 U2.37
  Top Layer w20: U3_C2.7 P4_C2.2 ; v1(3150,2650) 3175,2625 4176,2625
  Bottom Layer w20: P4_C2.2 3150,2875 v1(3150,2650)
NetP4_D2_1: P4_D2.1 R16_D2.3 | length 175
  Top Layer w10: P4_D2.1 R16_D2.3
NetP4_D2_2: P4_D2.2 U2.32 U3_D2.7 | length 2208.8
  Top Layer w10: v1(4161,2749) 4207.1,2702.9 U2.32
  Top Layer w20: U3_D2.7 P4_D2.2 3175,3725 3225,3775 v1(3850,3775)
  Bottom Layer w20: v1(3850,3775) 3925,3700 3925,3300 4162,3063 v1@4162,2749
NetP_ADC_1: P_ADC.1 U2.10 | length 602.7
  Top Layer w10: U2.10 4559,2516 P_ADC.1
NetP_ADC_2: P_ADC.2 U2.11 | length 544
  Top Layer w10: U2.11 4629.58,2545.42 P_ADC.2
NetP_ADC_3: P_ADC.3 U2.12 | length 510.7
  Top Layer w10: U2.12 4709.9,2565.1 P_ADC.3
NetP_ADC_4: P_ADC.4 U2.13 | length 477.5
  Top Layer w10: U2.13 4790.21,2584.79 P_ADC.4
NetP_ADC_5: P_ADC.5 U2.14 | length 444.2
  Top Layer w10: U2.14 4870.53,2604.47 P_ADC.5
NetP_ADC_6: P_ADC.6 U2.15 | length 453.1
  Top Layer w10: U2.15 4849.16,2624.16 P_ADC.6
NetP_ADC_7: P_ADC.7 U2.16 | length 486.3
  Top Layer w10: U2.16 4768.84,2643.84 P_ADC.7
NetP_ADC_8: P_ADC.8 U2.18 | length 511.4
  Top Layer w10: U2.18 4708.21,2683.21 P_ADC.8
NetP_ADC_9: P_ADC.9 U2.21 | length 577.2
  Top Layer w10: U2.21 4717,2752 4900,2935 P_ADC.9
NetP_Pot_1: P_Pot.1 U_Pot.4 | length 461.3
  Top Layer w10: U_Pot.4 4519,1275 4544,1300 P_Pot.1
NetP_Pot_2: P_Pot.2 U_Pot.5 | length 482.1
  Top Layer w10: U_Pot.5 4642,1325 4717,1400 P_Pot.2
NetP_Pot_3: P_Pot.3 U_Pot.8 | length 461.3
  Top Layer w10: U_Pot.8 4800,1475 4825,1500 P_Pot.3
NetP_Pot_4: P_Pot.4 U_Pot.9 | length 482.1
  Top Layer w10: U_Pot.9 4766,1525 4841,1600 P_Pot.4
NetP_Pot_5: P_Pot.5 U_Pot.10 | length 502.8
  Top Layer w10: U_Pot.10 4723,1575 4773,1625 4775,1627 4848,1700 P_Pot.5
NetR7_1: R7.1 R9.2 U_AB1.3 U_AB1.5 | length 569.2
  Top Layer w10: U_AB1.3 3591,1534 3625,1500 3700,1500 3761,1561 3761,1639 3740.94,1659.06 R9.2 R7.1 3684.28,1750 U_AB1.5
NetR8_1: R8.1 U_AB1.2 | length 86.2
  Top Layer w10: U_AB1.2 3541,1559 3559.06,1540.94 R8.1@3559.06,1500
NetR10_1: R10.1 U_AB1.6 | length 87.3
  Top Layer w10: U_AB1.6 3591,1816 3604.53,1829.53 R10.1
NetR11_1: R11.1 R13.2 U_CD1.3 U_CD1.5 | length 568.6
  Top Layer w10: U_CD1.3 3650,3100 3700,3050 3800,3050 3828.72,3078.72 3828.72,3146.28 R13.2 R11.1 3769.09,3270.47 U_CD1.5
NetR12_1: R12.1 U_CD1.2 | length 100
  Top Layer w10: R12.1 U_CD1.2
NetR14_1: R14.1 U_CD1.6 | length 87.3
  Top Layer w10: U_CD1.6 3654.53,3344.09 R14.1
NetR15_A2_2: R15_A2.2 R17_A2.2 U3_A2.2 | length 413.4
  Top Layer w20: R17_A2.2 2570.47,1325 ; v1(2592.72,1400) 2592.72,1347.24 2570.47,1325 ; U3_A2.2 2570.47,1325
  Bottom Layer w10: v1@2592.72,1407.28 v1@2600,1400
  Bottom Layer w20: v1@2592.72,1407.28 R15_A2.2
NetR15_A2_3: R15_A2.3 U3_A2.1 U3_A2.5 | length 1139.6
  Top Layer w20: U3_A2.1 R15_A2.3 2512,1394.28 2512,1188 2580.57,1119.43 2819.43,1119.43 2907.28,1207.28 U3_A2.5
NetR15_B2_2: R15_B2.2 R17_B2.2 U3_B2.2 | length 410.4
  Top Layer w20: R17_B2.2 2570.47,2125 ; v1(2592.72,2200) 2592.72,2147.24 2570.47,2125 ; U3_B2.2 2570.47,2125
  Bottom Layer w20: v1(2592.72,2200) R15_B2.2
NetR15_B2_3: R15_B2.3 U3_B2.1 U3_B2.5 | length 1135
  Top Layer w20: U3_B2.1 R15_B2.3 2512,2194.28 2512,1988 2575,1925 2825,1925 2907.28,2007.28 U3_B2.5
NetR15_C2_2: R15_C2.2 R17_C2.2 U3_C2.2 | length 374.2
  Top Layer w20: v1(2593.5,2999.21) 2593.5,2946.46 2571.26,2924.21 U3_C2.2@2693.5,2924.21
  Bottom Layer w20: v1@2593.5,3006.5 R15_C2.2@2593.5,3174.21
NetR15_C2_3: R15_C2.3 U3_C2.1 U3_C2.5 | length 1154.7
  Top Layer w20: U3_C2.1@2693.5,2974.21 2693.5,3174.21 2512.79,2993.5 2512.79,2787.21 2599,2701 2802.57,2701 2907.28,2805.71 U3_C2.5
NetR15_D2_2: R15_D2.2 R17_D2.2 U3_D2.2 | length 374.2
  Top Layer w20: v1(2596.06,3799.21) 2596.06,3746.46 2573.82,3724.21 U3_D2.2@2696.06,3724.21
  Bottom Layer w20: v1@2596.06,3806.5 R15_D2.2@2596.06,3974.21
NetR15_D2_3: R15_D2.3 U3_D2.1 U3_D2.5 | length 1134.4
  Top Layer w20: U3_D2.1@2696.06,3774.21 2696.06,3974.21 2515.35,3793.5 2515.35,3587.21 2578.35,3524.21 2828.35,3524.21 2907.28,3603.15 U3_D2.5
NetU2_25: U2.25
REFBP: C16.2 U2.34 V1.6 V1.7 | length 353
  Top Layer w10: V1.6 V1.7 4000,2677.56 C16.2 4025,2675 4036.47,2663.53 U2.34
VREF_A1: R5_A1.2 R6_A1.1 R8.2 U1_A1.3 U1_A1.5 U_AB1.1 | length 1920.4
  Top Layer w10: U1_A1.3 2025,1275 ; U_AB1.1 3491,1509 3500,1500 v1(3500,1425)
  Top Layer w20: 2025,1275 2075,1225 U1_A1.5 ; R5_A1.2 2350,1200 2400,1150 2513.23,1150 2569.8,1093.43 3468.43,1093.43 v1(3500,1125)
  Bottom Layer w20: v1(3500,1125) v1(3500,1425)
VREF_B1: R5_B1.2 R6_B1.1 R10.2 U1_B1.3 U1_B1.5 U_AB1.7 | length 1513.3
  Top Layer w20: 2025,2075 2075,2025 U1_B1.5 ; R5_B1.2 2420.47,1950 2513.23,1950 2564.23,1899 3521.47,1899 R10.2 3545.47,1797.76 U_AB1.7
VREF_C1: R5_C1.2 R6_C1.1 R12.2 U1_C1.3 U1_C1.5 U_CD1.1 | length 1828.7
  Top Layer w20: U1_C1.3 2025,2875 2075.79,2824.21 U1_C1.5@2208.07,2824.21 ; R5_C1.2@2371.26,2799.21 2420.47,2750 2513.23,2750 2588.23,2675 2813.34,2675 2838.34,2700 3425,2700 v1(3450,2725) ; v1(3540.94,2959.06) R12.2 3550,3034.06 U_CD1.1
  Bottom Layer w20: v1(3450,2725) 3540.94,2815.94 v1(3540.94,2959.06)
VREF_D1: R5_D1.2 R6_D1.1 R14.2 U1_D1.3 U1_D1.5 U_CD1.7 | length 1621.6
  Top Layer w20: U1_D1.3 2027.56,3675 2078.35,3624.21 U1_D1.5@2210.63,3624.21 ; R5_D1.2@2373.82,3599.21 2423.03,3550 2515.79,3550 2567.58,3498.21 2839.12,3498.21 2840.9,3500 3520.47,3500 R14.2 3595.47,3344.09 U_CD1.7
pads on no net: R15_A2.1 R15_B2.1 R15_C2.1 R15_D2.1 R16_A2.1 R16_B2.1 R16_C2.1 R16_D2.1 U2.9 U2.19 U2.20 U_Pot.1 U_Pot.2 U_Pot.7 U_Pot.11 U_Pot.12 U_Pot.13 U_Pot.16 U_Pot.21 U_Pot.24 V1.5 V1.8
copper on no net: | length 151.9
  Top Layer w10: 4468,2702.9 4543.9,2702.9 ; 4468,2722.58 4544,2722.58
  other v2: 4875,1125 1250,1700 1250,2500 1250,3300 4875,4000

## Polygon pours and split planes (outlines as drawn)
GND on Bottom Layer "GND_L04_P004" (solid, pour order 4): 4385,4100 4385,2110 4975,2110 4975,4100
AGND on Bottom Layer "AGND_L04_P000" (solid, pour order 0): 1025,4105 1025,1030 4975,1030 4975,2090 4365,2090 4365,4105
AGND on Top Layer "AGND_L01_P002" (solid, remove dead copper, pour order 2): 1024,4100 4360.6,4100 4365.18,2090 4975.01,2090 4976,1024 1024,1024
GND on Top Layer "GND_L01_P005" (solid, pour order 5): 4385,4100 4385,2110 4975,2110 4975,4100
GND on GND (split plane): 4979.9,2105.1 4380.1,2105.1 4380.1,4050 4380.1,4104.9 4979.9,4104.9
AGND on GND (split plane): 4369.9,4050 4369.9,2100 4370.29,2098.05 4371.4,2096.4 4373.05,2095.29 4375,2094.9 4979.9,2094.9 4979.9,1020.1 1020.1,1020.1 1020.1,4104.9 4369.9,4104.9
DVDD on POWER (split plane): 4979.9,2105.1 4380.1,2105.1 4380.1,4075 4380.1,4104.9 4979.9,4104.9
3.3V_A on POWER (split plane): 4369.9,4075 4369.9,2100 4370.29,2098.05 4371.4,2096.4 4373.05,2095.29 4375,2094.9 4979.9,2094.9 4979.9,1020.1 1020.1,1020.1 1020.1,4104.9 4369.9,4104.9

## Keep-outs
Keep-Out Layer:
  the board outline again, w47.24

## Other copper
Top Layer:
  region net AGND: 4333,2371 4336,2375 4336,2374 4348.59,2386.59 4355,2393 4365,2393 4365,2358 4346,2358
  region net AGND: 4454,2670 4406,2670 4406,2657 4454,2657
  region net AGND: 4374,2739 4385,2739 4385,2702 4374,2702
  region net AGND: 4354,2528 4354,2569 4366,2569 4366,2528
  region net VREF_D1: 2234.5,3636 2234.5,3613 2326.5,3613 2356.5,3583 2364.5,3583 2364.5,3618 2355.5,3618 2337.5,3636
  region net NetC4_D1_1: 2313,3684 2347,3684 2356,3693 2361,3693 2361,3657 2313,3657
  region net NetC4_D1_1: 2234.5,3687 2234.5,3663 2277.5,3663 2283.5,3657 2289.5,3657 2289.5,3684 2283.5,3684 2245.5,3684 2242.5,3687
  region net NetC1_D1_1: 1787.75,3791.75 1756.25,3791.75 1686.75,3722.25 1686.75,3677.25 1757.25,3606.75 1787.75,3606.75
  region net NetC2_D1_1: 2419.35,3842.21 2419.35,3581.21 2446.35,3581.21 2446.35,3842.21
  region net 3.3V_A: 2187,3868 2187,3763 2236,3763 2236,3815 2218,3833 2218,3868
  region net NetC2_D1_2: 2236,3737 2260,3761 2260,3815 2282,3837 2319,3837 2340,3816 2340,3785 2357,3768 2388,3768 2388,3733 2334,3733 2318,3716 2239,3716 2236,3713 2228,3713 2228,3737
  region net NetC3_D1_2: 1842.75,3717.25 1842.75,3682.25 1863.25,3682.25 1888.75,3707.75 1888.75,3738.25 1863.75,3738.25
  region net NetC1_D1_2: 1843,3793 1889,3793 1889,3762 1886,3762 1881,3757 1843,3757
  region net VREF_D1: 1846,3643 1890,3687 1976,3687 1976,3663 1962,3663 1906,3607 1839,3607 1839,3643
  region net NetC1_D1_2: 1917,3793 1917,3762 1918,3762 1919,3763 1965,3763 1965,3786 1958,3793
  region net NetC3_D1_2: 1917.5,3738 1963.5,3738 1965.5,3736 1965.5,3713 1924.5,3713 1918.5,3707 1917.5,3707
  region net NetP1_D1_1: 1640.35,3717.21 1459.35,3717.21 1459.35,3682.21 1640.35,3682.21
  region net NetR15_D2_3: 2696.06,3974.21 2553.06,3831.21 2621.35,3831.21 2667.35,3785.21 2667.35,3762.21 2696.06,3762.21 2696.06,3831.21
  region net VREF_C1: 2235.79,2835.21 2235.79,2812.21 2327.79,2812.21 2357.79,2782.21 2365.79,2782.21 2365.79,2817.21 2356.79,2817.21 2338.79,2835.21
  region net NetC4_C1_1: 2314.79,2883.21 2348.79,2883.21 2357.79,2892.21 2362.79,2892.21 2362.79,2856.21 2314.79,2856.21
  region net NetC4_C1_1: 2233.79,2886.21 2233.79,2862.21 2276.79,2862.21 2282.79,2856.21 2288.79,2856.21 2288.79,2883.21 2282.79,2883.21 2244.79,2883.21 2241.79,2886.21
  region net NetC1_C1_1: 1788.79,2991.71 1757.29,2991.71 1687.79,2922.21 1687.79,2877.21 1758.29,2806.71 1788.79,2806.71
  region net NetC2_C1_1: 2416.79,3042.21 2416.79,2781.21 2443.79,2781.21 2443.79,3042.21
  region net 3.3V_A: 2187,3068 2187,2963 2236,2963 2236,3015 2218,3033 2218,3068
  region net NetC2_C1_2: 2236,2936 2260,2960 2260,3014 2282,3036 2319,3036 2340,3015 2340,2984 2357,2967 2388,2967 2388,2932 2334,2932 2318,2915 2239,2915 2236,2912 2228,2912 2228,2936
  region net NetC3_C1_2: 1842.75,2917.25 1842.75,2882.25 1863.25,2882.25 1888.75,2907.75 1888.75,2938.25 1863.75,2938.25
  region net NetC1_C1_2: 1840,2993 1886,2993 1886,2962 1883,2962 1878,2957 1840,2957
  region net VREF_C1: 1844,2843 1888,2887 1974,2887 1974,2863 1960,2863 1904,2807 1837,2807 1837,2843
  region net NetC1_C1_2: 1917.21,2993 1917.21,2962 1919,2962 1920,2963 1966,2963 1966,2986 1959,2993
  region net NetC3_C1_2: 1916,2937.21 1963.79,2937.21 1965.79,2935.21 1965.79,2912.21 1924.79,2912.21 1919.58,2907 1916,2907
  region net NetP1_C1_1: 1637.79,2917.21 1456.79,2917.21 1456.79,2882.21 1637.79,2882.21
  region net NetR15_C2_3: 2693.5,3174.21 2550.5,3031.21 2618.79,3031.21 2664.79,2985.21 2664.79,2962.21 2693.5,2962.21 2693.5,3031.21
  region net 3.3V_A: 2187,2268 2187,2163 2236,2163 2236,2215 2218,2233 2218,2268
  region net VREF_B1: 2235,2036 2235,2013 2327,2013 2357,1983 2365,1983 2365,2018 2356,2018 2338,2036
  region net NetC4_B1_1: 2314,2084 2348,2084 2357,2093 2362,2093 2362,2057 2314,2057
  region net NetC4_B1_1: 2233,2087 2233,2063 2276,2063 2282,2057 2288,2057 2288,2084 2282,2084 2244,2084 2241,2087
  region net NetC1_B1_1: 1788,2192.5 1756.5,2192.5 1687,2123 1687,2078 1757.5,2007.5 1788,2007.5
  region net NetC2_B1_1: 2416,2243 2416,1982 2443,1982 2443,2243
  region net NetC2_B1_2: 2236,2137 2260,2161 2260,2215 2282,2237 2319,2237 2340,2216 2340,2185 2357,2168 2388,2168 2388,2133 2334,2133 2318,2116 2239,2116 2236,2113 2228,2113 2228,2137
  region net NetC3_B1_2: 1842,2117 1842,2082 1862.5,2082 1888,2107.5 1888,2138 1863,2138
  region net NetC1_B1_2: 1840,2193 1886,2193 1886,2162 1883,2162 1878,2157 1840,2157
  region net VREF_B1: 1843,2043 1887,2087 1973,2087 1973,2063 1959,2063 1903,2007 1836,2007 1836,2043
  region net NetC1_B1_2: 1917,2193 1917,2162 1918,2162 1919,2163 1965,2163 1965,2186 1958,2193
  region net NetC3_B1_2: 1917,2138 1963,2138 1965,2136 1965,2113 1924,2113 1918,2107 1917,2107
  region net NetP1_B1_1: 1637,2118 1456,2118 1456,2083 1637,2083
  region net NetR15_B2_3: 2692.72,2375 2549.72,2232 2618,2232 2664,2186 2664,2163 2692.72,2163 2692.72,2232
  region net NetR15_A2_3: 2692.72,1575 2549.72,1432 2618,1432 2664,1386 2664,1363 2692.72,1363 2692.72,1432
  region net NetP1_A1_1: 1637,1318 1456,1318 1456,1283 1637,1283
  region net NetC3_A1_2: 1917,1338 1963,1338 1965,1336 1965,1313 1924,1313 1918,1307 1917,1307
  region net NetC1_A1_2: 1917,1393 1917,1362 1918,1362 1919,1363 1965,1363 1965,1386 1958,1393
  region net VREF_A1: 1843,1243 1887,1287 1973,1287 1973,1263 1959,1263 1903,1207 1836,1207 1836,1243
  region net NetC1_A1_2: 1840,1393 1886,1393 1886,1362 1883,1362 1878,1357 1840,1357
  region net NetC3_A1_2: 1842,1317 1842,1282 1862.5,1282 1888,1307.5 1888,1338 1863,1338
  region net NetC2_A1_2: 2236,1337 2260,1361 2260,1415 2282,1437 2319,1437 2340,1416 2340,1385 2357,1368 2388,1368 2388,1333 2334,1333 2318,1316 2239,1316 2236,1313 2228,1313 2228,1337
  region net 3.3V_A: 2187,1468 2187,1363 2236,1363 2236,1415 2218,1433 2218,1468
  region net NetC2_A1_1: 2416,1443 2416,1182 2443,1182 2443,1443
  region net NetC1_A1_1: 1788,1392.5 1756.5,1392.5 1687,1323 1687,1278 1757.5,1207.5 1788,1207.5
  region net NetC4_A1_1: 2233,1287 2233,1263 2276,1263 2282,1257 2288,1257 2288,1284 2282,1284 2244,1284 2241,1287
  region net NetC4_A1_1: 2314,1284 2348,1284 2357,1293 2362,1293 2362,1257 2314,1257
  region net VREF_A1: 2235,1236 2235,1213 2327,1213 2357,1183 2365,1183 2365,1218 2356,1218 2338,1236
GND (plane layer: these items are gaps in the copper):
  lines w10: 4375,4125 4375,4050 4375,2100 5000,2100
POWER (plane layer: these items are gaps in the copper):
  lines w10: 4375,4125 4375,4075 4375,2100 5000,2100

## Silkscreen, mask and mechanical layers (free items; w line width, h text height)
Top Overlay:
  text "SHDN" at 4625,2975 h30
  text "~EOC" at 4625,2875 h30
  text "SCLK" at 4625,2775 h30
  text "DIN" at 4625,2675 h30
  text "DOUT" at 4629.11,2584.79 h30
  text "~CS" at 4625,2475 h30
  text "CONVRUN" at 4625,2375 h30
  text "DACSTEP" at 4625,2275 h30
  text "UP/DWN" at 4625,2175 h30
  text "SDO" at 4700,1700 h30
  text "CLK" at 4700,1600 h30
  text "SDI" at 4700,1500 h30
  text "~PR" at 4700,1400 h30
  text "~CS" at 4700,1300 h30
Bottom Overlay:
  drawing of 36 lines, arcs and shapes, not listed

## Text inside footprints (layer, text, board x,y; h text height)
U2: Top Overlay "TOL" at 4350,2634 h30 r90; Top Overlay "VAL" at 4350,2634 h30 r90; Top Overlay "DEV" at 4350,2634 h30 r90; Top Overlay "PN" at 4350,2634 h30 r90; Top Overlay "*" at 4251.57,2473 h30 r90; Mechanical 13 "RefDes2" at 4350,2634 h30 r90; Mechanical 13 "*" at 4251.57,2534 h30 r90